# Altium PCB segment.PcbDoc
Units mm, origin at the board's own origin, x right, y up, seen from the top; angles counter-clockwise.
Board outline 138.48 x 45.13 mm, 2 copper layers (Top Layer, Bottom Layer); 9 components, 0 nets, 197 pads, 8 vias.
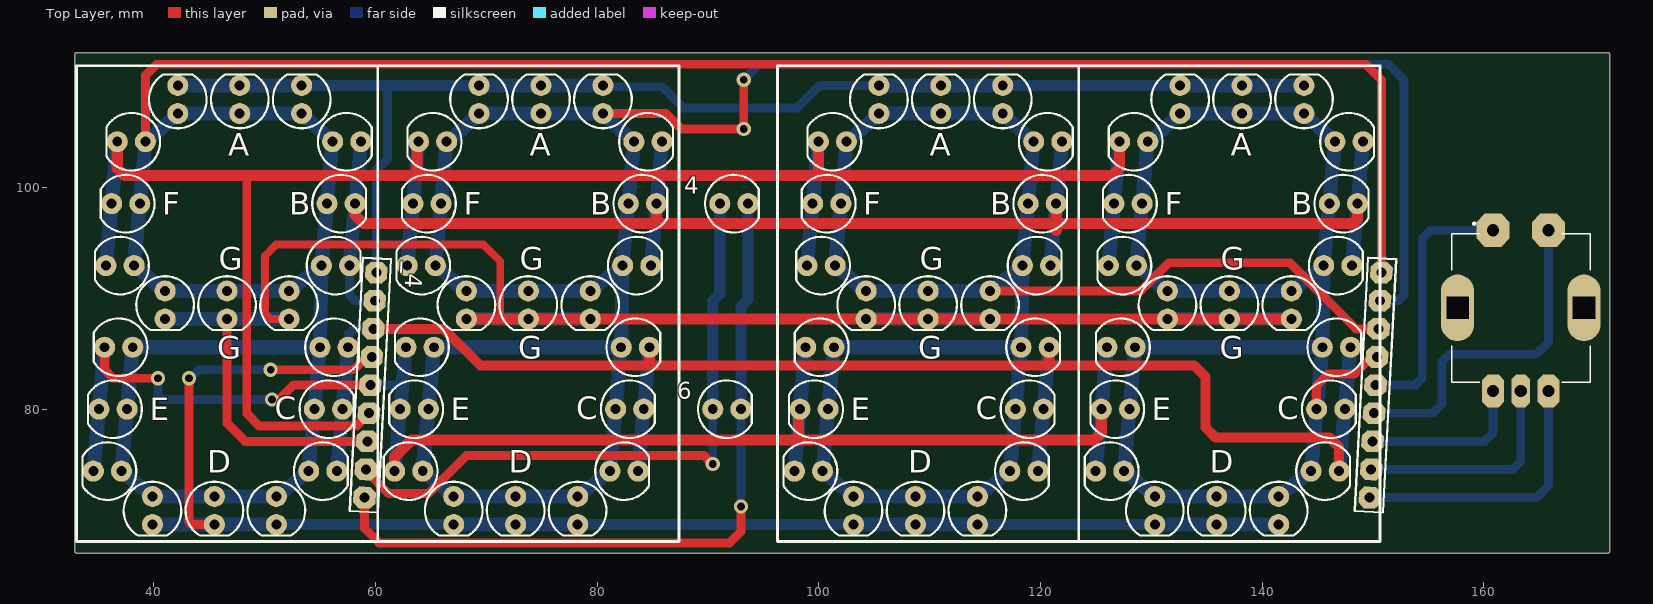
[diagram p0: Top Layer view]
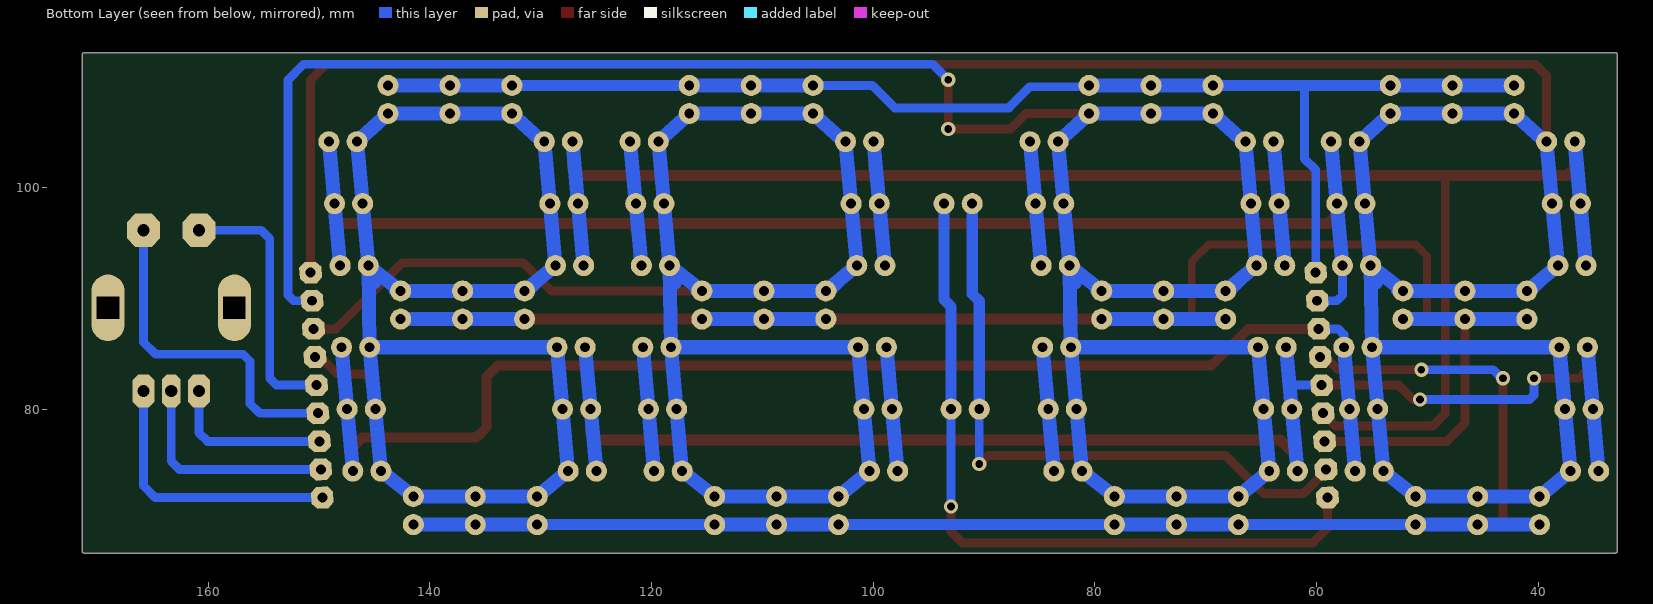
[diagram p1: Bottom Layer view, seen from below]

## Layer stack, top to bottom
Top Solder: solder mask 0.0102, Solder Resist, Dk 3.5
Top Layer: signal copper 0.0356
Dielectric 1: dielectric 0.32, FR-4, Dk 4.8
Bottom Layer: signal copper 0.0356
Bottom Solder: solder mask 0.0102, Solder Resist, Dk 3.5

## Board outline
33.02,67.033 cw(c33.02,67.183) 32.87,67.183 32.87,112.014 cw(c33.02,112.014) 33.02,112.164 171.196,112.164 cw(c171.196,112.014) 171.346,112.014 171.346,67.183 cw(c171.196,67.183) 171.196,67.033

## Design rules (kind name [scope] priority, off if disabled: settings)
Clearance [All] p1: gap=0.254 ignorepadtopadclearanceinfootprint=FALSE except(0: Arc-Hole Track-Hole SMDPad-Hole THPad-Hole Via-Hole Fill-Hole Poly-Hole Region-Hole Text-Hole)
PolygonConnect [All] p1: connectstyle=Relief reliefconductorwidth=0.254 reliefentries=4 polygonreliefangle="90 Angle" airgapwidth=0.254
RoutingVias [All] p1: holewidth=0.711 width=1.27 viastyle="Through Hole" minholewidth=0.711 minwidth=1.27 maxholewidth=0.711 maxwidth=1.27
SolderMaskExpansion [All] p1: expansion=0.102 istentingtop=FALSE
Width [All] p1: maxlimit=0.254 minlimit=0.254 preferedwidth=0.254
30 further rules are at their usual default settings.

## Components (designator, comment, footprint, x,y, rotation, side; value= is the part's Value field where it differs from the comment)
4 "Comment" LED.5 92.329,98.552 r180 top
6 "Comment" LED.5 91.694,80.01 r180 top
_4 "Comment" HDR1X9#1 60.071,92.329 r267 top
? "Comment" HDR1X9#2 150.749,92.329 r267 top
? "Comment" XDCR_PEC11R-4215F-S0024 163.322,89.154 r0 top
? "Comment" "7SEG 4*2 * 2.7" 129.794,71.12 r0 top
? "Comment" "7SEG 4*2 * 2.7" 156.972,71.12 r0 top
? "Comment" "7SEG 4*2 * 2.7" 93.726,71.12 r0 top
? "Comment" "7SEG 4*2 * 2.7" 66.548,71.12 r0 top

## Footprints (in the part's own frame and the unit in brackets; to place one, negate y for a bottom-side part, rotate by r counter-clockwise, add the part's x,y. Pads: shape width x height; smd on the part's side, far side on the other; paste and mask are expansions set on the pad)
"7SEG 4*2 * 2.7" [mm]
  round 1.9 hole 0.9: A(-29.464,3.302) A(-28.956,8.89) A(-28.448,14.478) A(-28.321,21.844) A(-27.813,27.432) A(-27.305,33.02) A(-26.67,1.016) A(-25.527,19.558) A(-24.384,35.56) A(-21.082,1.016) A(-19.939,19.558) A(-18.796,35.56) A(-15.494,1.016) A(-14.351,19.558) A(-13.208,35.56) A(-12.573,3.302) A(-12.065,8.89) A(-11.557,14.478) A(-11.43,21.844) A(-10.922,27.432) A(-10.414,33.02) K(-32.004,3.302) K(-31.496,8.89) K(-30.988,14.478) K(-30.861,21.844) K(-30.353,27.432) K(-29.845,33.02) K(-26.67,-1.524) K(-25.527,17.018) K(-24.384,38.1) K(-21.082,-1.524) K(-19.939,17.018) K(-18.796,38.1) K(-15.494,-1.524) K(-14.351,17.018) K(-13.208,38.1) K(-10.033,3.302) K(-9.525,8.89) K(-9.017,14.478) K(-8.89,21.844) K(-8.382,27.432) K(-7.874,33.02)
  Bottom Layer lines w0.889: -16.891,19.558 -14.351,19.558 -14.224,19.558 ; -13.716,19.558 -26.035,19.558 -28.321,21.844 -27.305,33.02 -24.384,35.56 -13.208,35.56 -10.414,33.02 -11.43,21.844 -11.557,14.478 ; -12.192,20.701 -12.065,20.828 -12.065,20.193 ; -11.531,15.962 -11.531,16.738 ; -11.39,22.519 -11.369,22.519 ; -11.557,14.478 -28.448,14.478 -29.464,3.302 -26.67,1.016 -15.494,1.016 -12.573,3.302 -11.557,14.478
  Bottom Layer lines w1.27: -32.004,3.302 -30.988,14.478 ; -30.861,21.844 -29.845,33.02 ; -25.527,17.018 -14.351,17.018 ; -24.384,38.1 -13.208,38.1 ; -10.033,3.302 -9.017,14.478 ; -8.89,21.844 -7.874,33.02 ; -11.557,14.478 -11.43,21.844 ; -11.557,14.478 -28.448,14.478 -29.464,3.302 -26.67,1.016 -15.494,1.016 -12.573,3.302 -11.557,14.478 ; -11.43,21.844 -14.351,19.558 -25.527,19.558 -28.321,21.844 -27.317,32.893 -24.384,35.56 -13.208,35.56 -10.414,33.02 -11.43,21.844 ; -26.67,-1.524 -15.494,-1.524 -26.67,-1.524
  silkscreen extent -33.53,-3.05 -6.35,39.88
HDR1X9#1 [mm] "Connector; Header; 9 Position"
  oct 2x2 hole 0.9: A(0,0) A(20.32,0) B(2.54,0) C(5.08,0) D(7.62,0) E(10.16,0) F(12.7,0) G(15.24,0) K(17.78,0)
  silkscreen extent -1.27,-1.27 21.59,1.27
HDR1X9#2 [mm] "Connector; Header; 9 Position"
  oct 2x2 hole 0.9: 1(10.16,0) 2(12.7,0) AR(15.24,0) BR(20.32,0) C1(7.62,0) C2(5.08,0) C3(2.54,0) C4(0,0) COM(17.78,0)
  silkscreen extent -1.27,-1.27 21.59,1.27
LED.5 [mm]
  round 1.9 hole 0.9: A(1.27,0) K(-1.27,0)
  silkscreen extent -2.25,-2.6 2.6,2.6
XDCR_PEC11R-4215F-S0024 [mm]
  oct 3x3 hole 1.1: 1(-2.5,7) 2(2.5,7)
  oct 2x3 hole 1.1: A(-2.5,-7.5) B(2.5,-7.5)
  oct 1.65x3 hole 1.1: COM(0,-7.5)
  oval 3x6 hole 2 square: S1(-5.7,0) S2(5.7,0)
  silkscreen extent -6.25,-6.7 6.25,7.7

## Via types
v1: diameter 1.27, hole 0.711, Top Layer to Bottom Layer, 8 vias

## Nets (pads, with @x,y where several pads share a name; then routed paths per layer and width w, separated by ;. In a path a pad name is that pad's centre, name@x,y a point inside that pad or via, vN(x,y) a via of type N, cw(c..) or ccw(c..) an arc to the next point about the centre after c; other vN are vias at no path point)
pads on no net: 4.A 4.K 6.A 6.K ?.1 ?.2 ?.A ?.AR ?.B ?.BR ?.C1 ?.C2 ?.C3 ?.C4 ?.COM ?.K ?.S1 ?.S2 _4.A _4.B _4.C _4.D _4.E _4.F _4.G _4.K
copper on no net: | length 1315.8
  Top Layer w0.7: 52.197,88.138 50.546,88.138 50.038,88.646 50.038,93.853 51.054,94.869 69.723,94.869 71.247,93.345 71.247,88.392
  Top Layer w0.8: 35.56,85.598 35.56,83.566 36.322,82.804 v1(40.386,82.804) ; 39.243,104.14 39.243,110.109 40.259,111.125 149.352,111.125 150.749,109.728 150.749,92.329 ; v1(43.18,82.804) 43.18,69.85 43.434,69.596 45.466,69.596 ; 46.609,88.138 46.609,78.74 48.239,77.11 59.273,77.11 ; 48.387,101.092 48.387,79.629 49.53,78.486 58.246,78.486 59.406,79.646 ; v1(50.546,83.566) 58.039,83.566 59.192,84.719 59.672,84.719 ; v1(50.673,80.899) 51.308,80.899 52.592,82.183 59.539,82.183 ; 59.008,72.037 59.008,69.262 60.325,67.945 91.948,67.945 92.964,68.961 v1(92.964,71.247) ; 59.14,74.573 59.14,74.464 61.214,72.39 64.77,72.39 68.199,75.819 89.662,75.819 v1(90.424,75.057) ; 80.518,106.68 86.233,106.68 87.63,105.283 v1(93.218,105.283) v1(93.218,109.728) ; 115.443,90.678 129.032,90.678 131.572,93.218 142.494,93.218 148.456,87.256 150.483,87.256 ; 144.907,80.01 144.907,82.169 145.923,83.185 148.336,83.185 149.87,84.719 150.35,84.719
  Top Layer w0.9: 59.805,87.256 66.16,87.256 69.469,83.947 133.858,83.947 134.874,82.931 134.874,78.359 135.763,77.47 146.05,77.47 146.939,76.581 146.939,74.422
  Top Layer w1: 36.703,104.14 36.703,101.727 37.338,101.092 126.492,101.092 127.127,101.727 127.127,104.14 ; 57.404,85.598 57.531,85.598 ; 58.166,98.552 58.166,97.536 58.928,96.774 148.209,96.774 148.59,97.155 148.59,98.552 ; 58.674,104.14 58.928,104.14 ; 61.722,74.422 61.722,75.692 63.246,77.216 124.841,77.216 125.476,77.851 125.476,80.01 ; 62.103,80.01 62.23,80.01 ; 63.754,101.092 63.754,104.14 63.881,104.14 ; 67.945,88.138 142.621,88.138 ; 84.709,84.201 84.709,85.598 ; 85.344,96.774 85.344,98.552 ; 98.171,77.216 98.171,80.01 ; 99.949,101.092 99.949,104.14 ; 120.777,84.328 120.777,85.598 ; 121.412,96.139 121.412,98.552
  Bottom Layer w0.8: v1(40.386,82.804) 40.386,81.28 40.767,80.899 v1(50.673,80.899) ; v1@43.18,82.677 44.069,83.566 v1(50.546,83.566) ; 57.531,85.598 57.531,86.741 58.046,87.256 59.805,87.256 ; 57.658,92.964 57.658,90.297 58.163,89.792 59.938,89.792 ; 59.539,82.183 62.343,82.183 62.357,82.169 ; 60.071,92.329 60.071,101.6 61.087,102.616 61.087,109.22 ; 80.645,109.093 85.852,109.093 87.757,107.188 98.044,107.188 100.076,109.22 105.41,109.22 ; v1(90.424,75.057) 90.424,80.01 ; v1(92.964,71.247) 92.964,80.01 ; v1(93.218,109.728) 94.615,111.125 151.384,111.125 152.781,109.728 152.781,90.297 152.276,89.792 150.616,89.792 ; 149.686,72.037 164.747,72.037 165.822,73.112 165.822,81.654 ; 149.818,74.573 162.584,74.573 163.322,75.311 163.322,81.654 ; 149.951,77.11 160.041,77.11 160.822,77.891 160.822,81.654 ; 150.084,79.646 155.338,79.646 156.21,80.518 156.21,84.328 156.845,84.963 164.719,84.963 165.822,86.066 165.822,96.154 ; 150.217,82.183 153.811,82.183 154.432,82.804 154.432,95.377 155.209,96.154 160.822,96.154
  Bottom Layer w1: 50.8,69.596 130.302,69.596 ; 53.34,109.22 75.946,109.22 ; 90.424,80.01 90.424,89.789 91.059,90.424 91.059,98.552 ; 92.964,80.01 92.964,89.281 93.599,89.916 93.599,98.552 ; 105.537,109.22 143.764,109.22

## Silkscreen, mask and mechanical layers (free items; w line width, h text height)
Mechanical 13:
  lines w0.3: 33.02,70.739 33.02,67.183 ; 33.02,108.585 33.02,112.014 ; 36.449,67.183 33.02,67.183 ; 36.576,112.014 33.02,112.014 ; 167.64,67.183 171.196,67.183 ; 167.767,112.014 171.196,112.014 ; 171.196,70.612 171.196,67.183 ; 171.196,108.458 171.196,112.014 ; 33.02,67.183 171.196,67.183 ; 33.02,67.183 33.02,112.014 ; 33.02,112.014 34.544,112.014 171.196,112.014 ; 171.196,67.183 171.196,112.014

## Text inside footprints (layer, text, board x,y; h text height)
?: Top Overlay "G" at 109.093,92.583 h2.03; Top Overlay "G" at 108.966,84.582 h2.03; Top Overlay "F" at 104.013,97.536 h2.03; Top Overlay "E" at 102.87,78.994 h2.03; Top Overlay "D" at 108.077,74.295 h2.03; Top Overlay "C" at 114.173,79.121 h2.03; Top Overlay "B" at 115.443,97.536 h2.03; Top Overlay "A" at 109.982,102.87 h2.03
?: Top Overlay "G" at 136.271,92.583 h2.03; Top Overlay "G" at 136.144,84.582 h2.03; Top Overlay "F" at 131.191,97.536 h2.03; Top Overlay "E" at 130.048,78.994 h2.03; Top Overlay "D" at 135.255,74.295 h2.03; Top Overlay "C" at 141.351,79.121 h2.03; Top Overlay "B" at 142.621,97.536 h2.03; Top Overlay "A" at 137.16,102.87 h2.03
?: Top Overlay "G" at 73.025,92.583 h2.03; Top Overlay "G" at 72.898,84.582 h2.03; Top Overlay "F" at 67.945,97.536 h2.03; Top Overlay "E" at 66.802,78.994 h2.03; Top Overlay "D" at 72.009,74.295 h2.03; Top Overlay "C" at 78.105,79.121 h2.03; Top Overlay "B" at 79.375,97.536 h2.03; Top Overlay "A" at 73.914,102.87 h2.03
?: Top Overlay "G" at 45.847,92.583 h2.03; Top Overlay "G" at 45.72,84.582 h2.03; Top Overlay "F" at 40.767,97.536 h2.03; Top Overlay "E" at 39.624,78.994 h2.03; Top Overlay "D" at 44.831,74.295 h2.03; Top Overlay "C" at 50.927,79.121 h2.03; Top Overlay "B" at 52.197,97.536 h2.03; Top Overlay "A" at 46.736,102.87 h2.03